# Altium PCB PCB1.PcbDoc
Units mm, origin at the board's own origin, x right, y up, seen from the top; angles counter-clockwise.
Board outline 70.1 x 85.1 mm, 2 copper layers (Top Layer, Bottom Layer), stack 1.58 mm thick; 60 components, 60 nets, 204 pads, 9 vias.
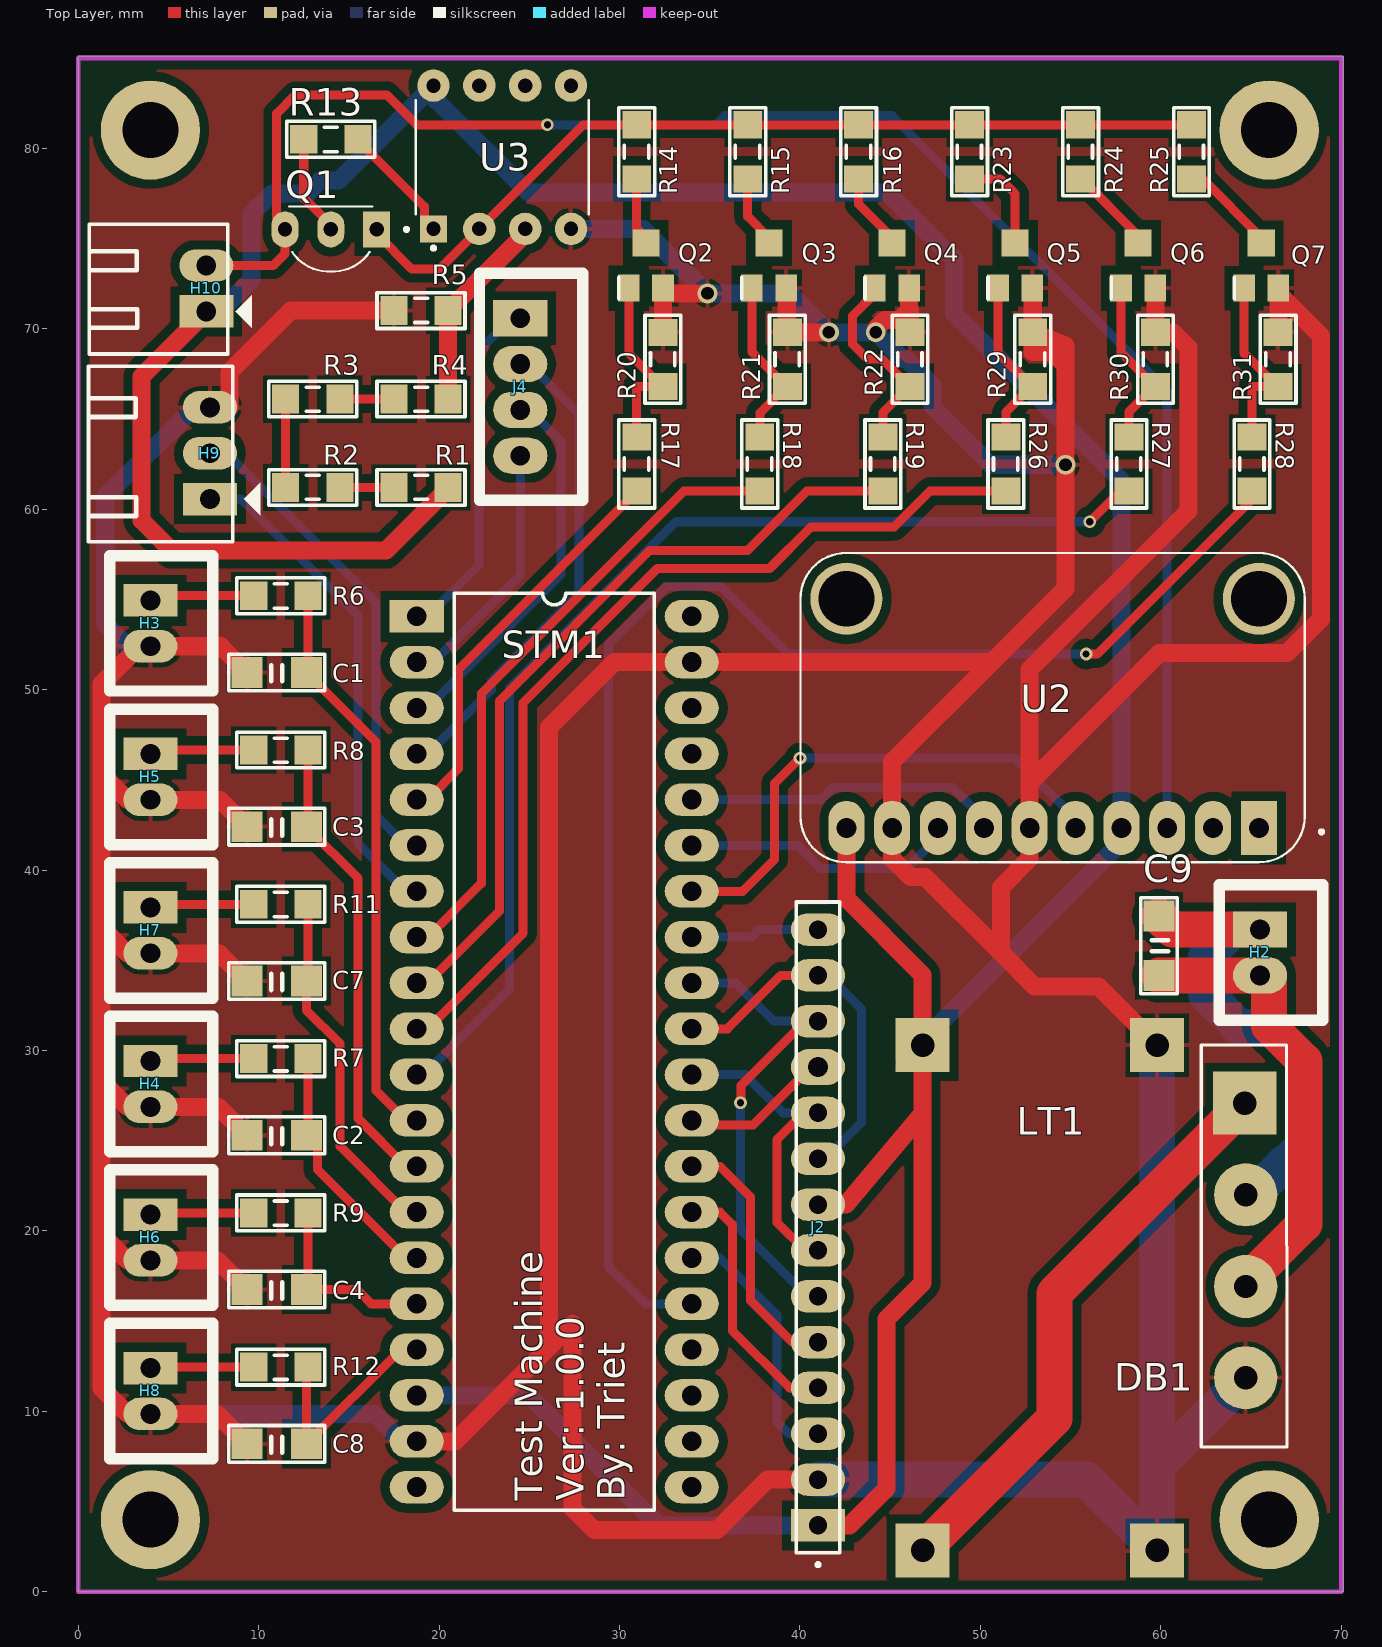
[diagram p0: Top Layer view]
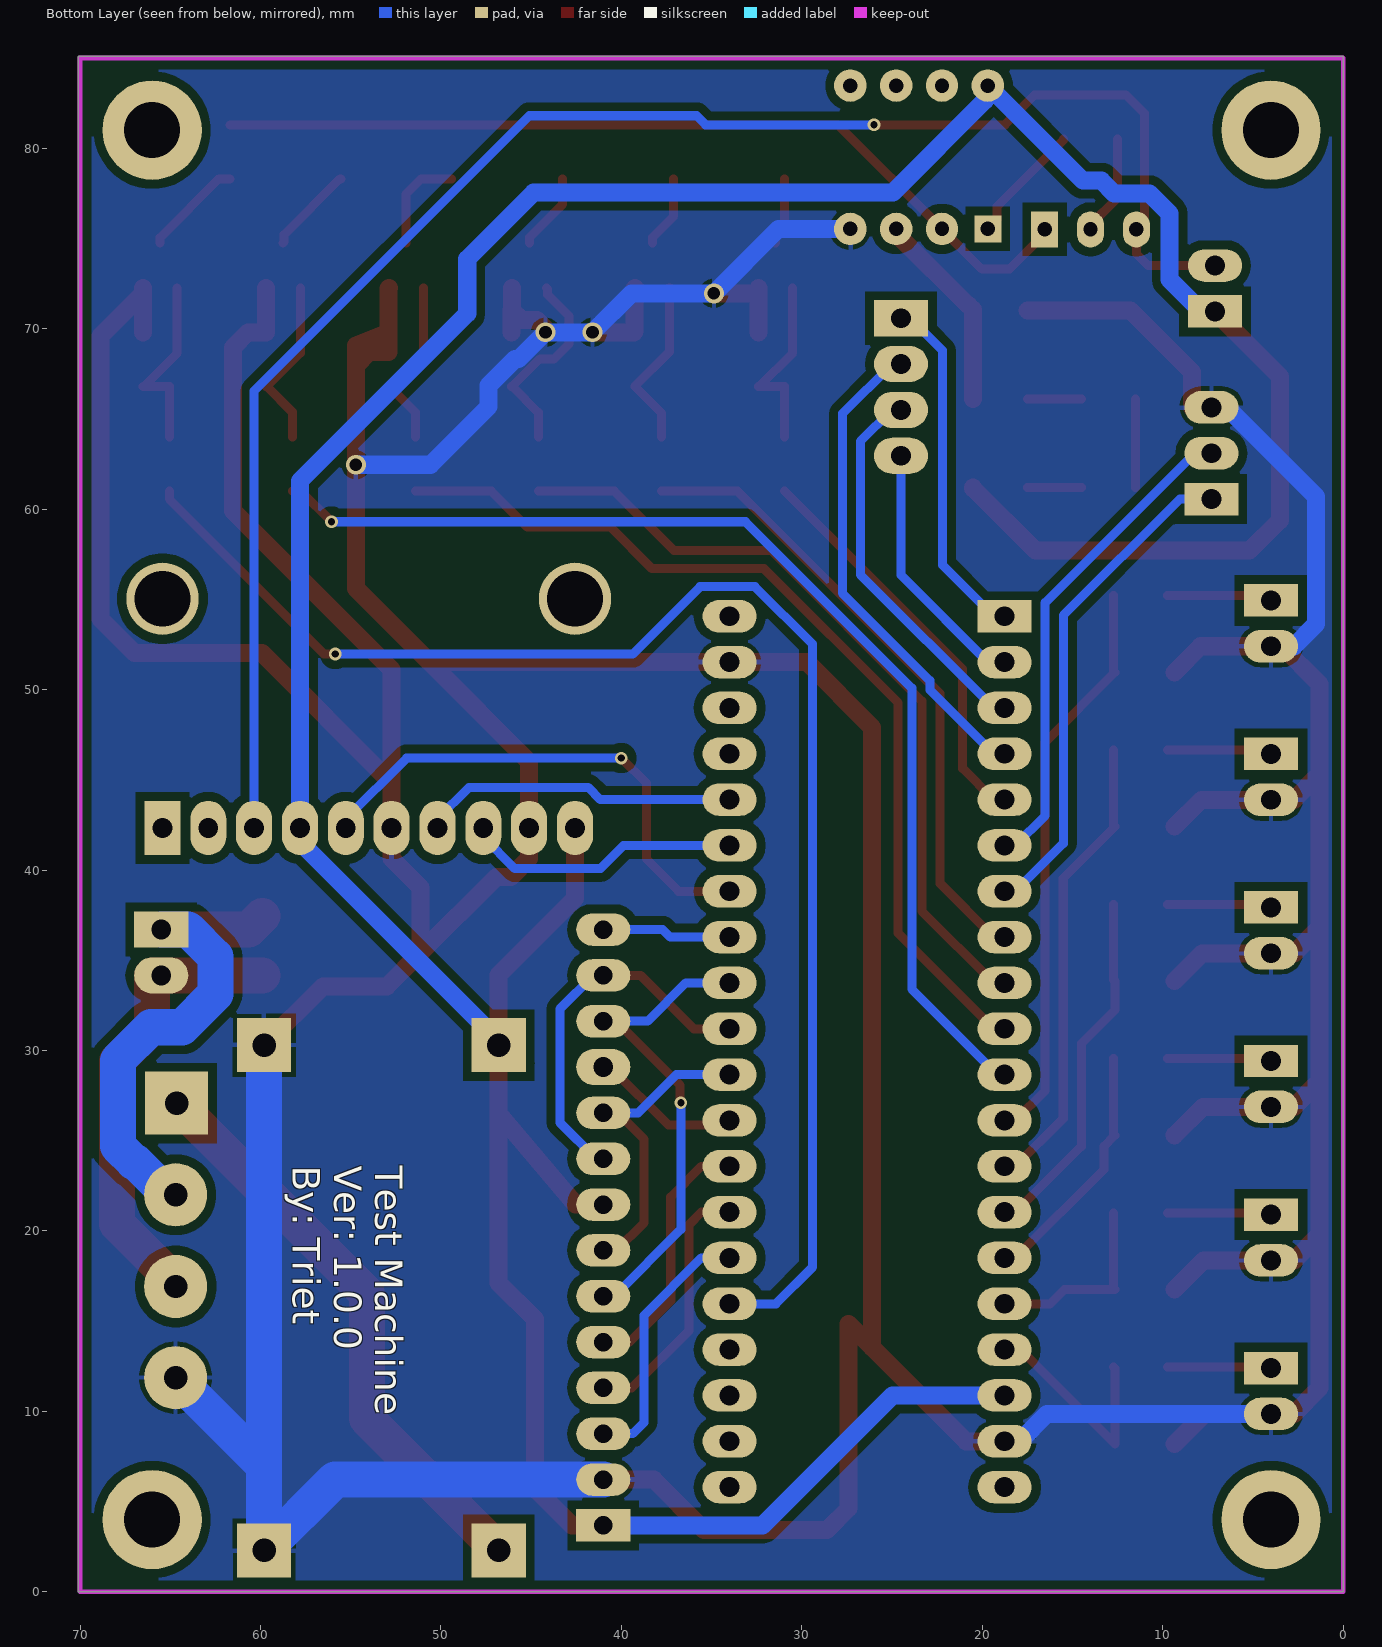
[diagram p1: Bottom Layer view, seen from below]
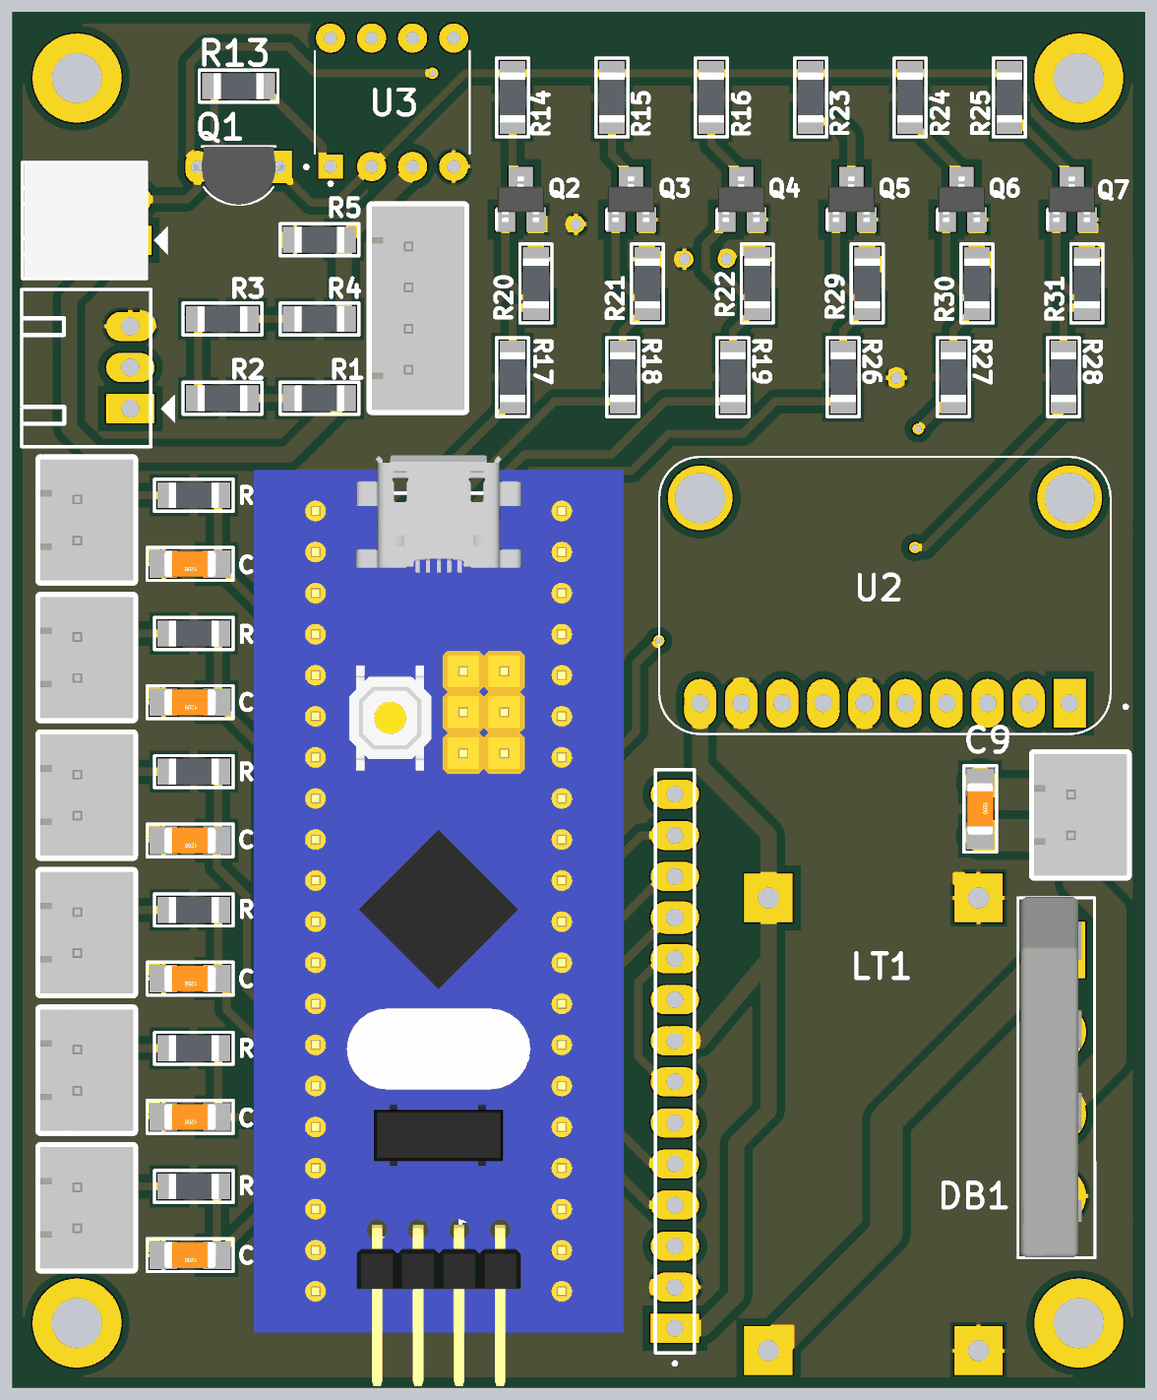
[diagram p2: 3D render of the assembled board from above, using the file's embedded part models]

## Layer stack, top to bottom
Top Solder: solder mask 0.01, Solder Resist, Dk 3.5
Top Layer: signal copper 0.035
Dielectric 1: dielectric 1.51, FR-4, Dk 4.8
Bottom Layer: signal copper 0.035
Bottom Solder: solder mask 0.01, Solder Resist, Dk 3.5

## Board outline
0,0 0,85.1 70.1,85.1 70.1,0

## Design rules (kind name [scope] priority, off if disabled: settings)
Clearance [All] p1: gap=0.5 ignorepadtopadclearanceinfootprint=FALSE
HoleSize [All] p1: absolutevalues=TRUE maxlimit=3.2 minlimit=0.025 maxpercent=80.000 minpercent=20.000
PolygonConnect [All] p1: connectstyle=Relief reliefconductorwidth=0.254 reliefentries=4 polygonreliefangle="90 Angle" airgapwidth=0.254
RoutingVias RoutingVias_power [InNetClass('power_class')] p1: holewidth=0.7 width=1.1 viastyle="Through Hole" minholewidth=0.7 minwidth=1.1 maxholewidth=0.7 maxwidth=1.1
RoutingVias RoutingVias_signal [All] p2: holewidth=0.4 width=0.7 viastyle="Through Hole" minholewidth=0.4 minwidth=0.7 maxholewidth=0.4 maxwidth=0.7
SilkToSilkClearance [All] p1: silktosilkclearance=0
SilkToSolderMaskClearance [IsPad] p1: minsilkscreentomaskgap=0 clearancetoexposedcopper=TRUE
SolderMaskExpansion [All] p1: expansion=0.102 istentingtop=FALSE
Width Width_power [InNetClass('power_class')] p1: maxlimit=2 minlimit=0.7 preferedwidth=1
Width Width_signal [All] p2: maxlimit=0.5 minlimit=0.5 preferedwidth=0.5
27 further rules are at their usual default settings.

## Classes and differential pairs
net class power_class: 0V +5 +12 GND IN+ VCC

## Components (designator, comment, footprint, x,y, rotation, side; value= is the part's Value field where it differs from the comment)
C1 "10nF" "Cap 1206" 11,50.95 r180 top
C2 "10nF" "Cap 1206" 11,25.3 r180 top
C3 "10nF" "Cap 1206" 11,42.4 r180 top
C4 "10nF" "Cap 1206" 11,16.75 r180 top
C7 "10nF" "Cap 1206" 11,33.85 r180 top
C8 "10nF" "Cap 1206" 11,8.2 r180 top
C9 "100uF" "Cap 1206" 59.9,35.8 r270 top
DB1 "6A 1000V" "DIODE CAU 6A CAM" 64.7,27.08 r270 top
H2 "POWER" XH2.54M-2#1 65.5,36.7 r270 top
H3 "BUTTON1" XH2.54M-2#2 4,54.94 r270 top
H4 "BUTTON4" XH2.54M-2#2 4,29.416 r270 top
H5 "BUTTON2" XH2.54M-2#2 4,46.432 r270 top
H6 "BUTTON5" XH2.54M-2#2 4,20.908 r270 top
H7 "BUTTON3" XH2.54M-2#2 4,37.924 r270 top
H8 "BUTTON6" XH2.54M-2#2 4,12.4 r270 top
H9 "COMPORT" "Header 3P DC 2.54" 7.3,60.56 r180 top
H10 "QUEDO" "Header 2P DC 2.54" 7.1,70.96 r180 top
J2 "TFT_TOUCH" SAMTEC_ESQ-114-38-G-S 41,3.68 r90 top
J4 "SDCARD" XH2.54M-4 24.5,70.58 r270 top
LT1 "LT3045" PCBCOMPONENT_1 59.794,2.294 r90 top
Q1 "2N3904" TO92254P460H750-3 14,75.5 r180 top
Q2 "AO3400" SOT95P280X125-3N 31.462,73.5 r90 top
Q3 "AO3400" SOT95P280X125-3N 38.282,73.5 r90 top
Q4 "AO3400" SOT95P280X125-3N 45.102,73.5 r90 top
Q5 "AO3400" SOT95P280X125-3N 51.922,73.5 r90 top
Q6 "AO3400" SOT95P280X125-3N 58.742,73.5 r90 top
Q7 "AO3400" SOT95P280X125-3N 65.562,73.5 r90 top
R1 "1K" "RES 1206" 19,61.2 r0 top
R2 "1K" "RES 1206" 13,61.2 r0 top
R3 "1K" "RES 1206" 13,66.1 r180 top
R4 "1K" "RES 1206" 19,66.1 r180 top
R5 "1K" "RES 1206" 19,71 r0 top
R6 "100R" "RES 1206" 11.229,55.2 r180 top
R7 "100R" "RES 1206" 11.229,29.55 r180 top
R8 "100R" "RES 1206" 11.229,46.65 r180 top
R9 "100R" "RES 1206" 11.229,21 r180 top
R11 "100R" "RES 1206" 11.229,38.1 r180 top
R12 "100R" "RES 1206" 11.229,12.45 r180 top
R13 "1K" "RES 1206" 14,80.5 r180 top
R14 "10R" "RES 1206" 30.952,79.8 r90 top
R15 "100R" "RES 1206" 37.102,79.8 r90 top
R16 "1K" "RES 1206" 43.251,79.8 r90 top
R17 "1K" "RES 1206" 30.952,62.5 r90 top
R18 "1K" "RES 1206" 37.772,62.5 r90 top
R19 "1K" "RES 1206" 44.592,62.5 r90 top
R20 "10K" "RES 1206" 32.4,68.3 r90 top
R21 "10K" "RES 1206" 39.3,68.3 r90 top
R22 "10K" "RES 1206" 46.1,68.3 r90 top
R23 "10K" "RES 1206" 49.401,79.8 r90 top
R24 "100K" "RES 1206" 55.55,79.8 r90 top
R25 "1M" "RES 1206" 61.7,79.8 r90 top
R26 "1K" "RES 1206" 51.412,62.5 r90 top
R27 "1K" "RES 1206" 58.232,62.5 r90 top
R28 "1K" "RES 1206" 65.052,62.5 r90 top
R29 "10K" "RES 1206" 52.9,68.3 r90 top
R30 "10K" "RES 1206" 59.7,68.3 r90 top
R31 "10K" "RES 1206" 66.5,68.3 r90 top
STM1 "KIT STM32F103C8T6" "STM32F103 KIT" 18.76,54.06 r0 top
U2 "ADS1115" MODULE_ZC261500 54,49 r0 top
U3 "OPA2134PA" DIP794W45P254L959H508Q8 23.5,79.5 r90 top

## Footprints (in the part's own frame and the unit in brackets; to place one, negate y for a bottom-side part, rotate by r counter-clockwise, add the part's x,y. Pads: shape width x height; smd on the part's side, far side on the other; paste and mask are expansions set on the pad)
"Cap 1206" [mm]
  rect 1.7x1.7 smd: 1(-1.65,0) 2(1.65,0)
  silkscreen extent -2.67,-1.02 2.67,1.02, body extent -1.6,-0.8 1.6,0.8, height 1.02
"DIODE CAU 6A CAM" [mm] "DIODE CAU 6A CAM"
  rect 3.5x3.5 hole 1.3: 1(0,-0.051)
  round 3.5 hole 1.3: 2(5.08,0) 3(10.16,0) 4(15.215,0)
  silkscreen extent -3.23,-2.46 19.05,2.3, body extent -3.28,-2.29 19.02,1.47, height 23.8
DIP794W45P254L959H508Q8 [mm]
  rect 1.5x1.5 hole 0.8: 1(-3.97,3.81)
  round 1.8 hole 0.8: 2(-3.97,1.27) 3(-3.97,-1.27) 4(-3.97,-3.81) 5(3.97,-3.81) 6(3.97,-1.27) 7(3.97,1.27) 8(3.97,3.81)
  silkscreen extent -5.13,-4.79 3.18,4.8
"Header 2P DC 2.54" [mm]
  rect 3x1.8 hole 1.1: 1(0,0)
  oval 3x1.8 hole 1.1: 2(0,-2.54)
  silkscreen extent -2.53,-4.83 6.48,2.36, body extent -1.27,-4.82 6.35,2.28, height 6.01
"Header 3P DC 2.54" [mm]
  rect 3x1.8 hole 1.1: 1(0,0)
  oval 3x1.8 hole 1.1: 2(0,-2.54) 3(0,-5.08)
  silkscreen extent -2.78,-7.37 6.73,2.36
MODULE_ZC261500 [mm]
  rect 2x3 hole 1.1: 1(11.43,-6.668)
  oval 2x3 hole 1.1: 2(8.89,-6.668) 3(6.35,-6.668) 4(3.81,-6.668) 5(1.27,-6.668) 6(-1.27,-6.668) 7(-3.81,-6.668) 8(-6.35,-6.668) 9(-8.89,-6.668) 10(-11.43,-6.668)
  round 4 hole 3.1: P1(-11.43,6.032) P2(11.43,6.032)
  silkscreen extent -13.97,-8.57 15,8.57
PCBCOMPONENT_1 [mm]
  rect 3x3 hole 1.3: 1(28,13) 2(28,0) 3(0,0) 4(0,13)
"RES 1206" [mm]
  rect 1.5x1.6 smd: 1(-1.5,0) 2(1.5,0)
  silkscreen extent -2.44,-0.99 2.44,0.99, body extent -1.55,-0.8 1.55,0.8, height 0.55
SAMTEC_ESQ-114-38-G-S [mm]
  rect 1.8x3 hole 1.02: 01(0,0)
  oval 1.8x3 hole 1.02: 02(2.54,0) 03(5.08,0) 04(7.62,0) 05(10.16,0) 06(12.7,0) 07(15.24,0) 08(17.78,0) 09(20.32,0) 10(22.86,0) 12(27.94,0) 13(30.48,0) 14(33.02,0)
  oval 2x3 hole 1.1: 11(25.4,0)
  silkscreen extent -2.27,-1.2 34.54,1.21
SOT95P280X125-3N [mm]
  rect 1.5x1.2 smd: 1(-1.25,0.95) 2(-1.25,-0.95)
  rect 1.5x1.5 smd: 3(1.25,0)
  silkscreen extent -1.85,1.5 -0.65,1.5, body extent -1.4,-1.45 1.4,1.45, height 1.25
"STM32F103 KIT" [mm]
  rect 3x1.8 hole 1.1: 1(0,0)
  oval 3x1.8 hole 1.1: 2(0,-2.54) 3(0,-5.08) 4(0,-7.62) 5(0,-10.16) 6(0,-12.7) 7(0,-15.24) 8(0,-17.78) 9(0,-20.32) 10(0,-22.86) 11(0,-25.4) 12(0,-27.94) 13(0,-30.48) 14(0,-33.02) 15(0,-35.56) 16(0,-38.1) 17(0,-40.64) 18(0,-43.18) 19(0,-45.72) 20(0,-48.26) 21(15.24,-48.26) 22(15.24,-45.72) 23(15.24,-43.18) 24(15.24,-40.64) 25(15.24,-38.1) 26(15.24,-35.56) 27(15.24,-33.02) 28(15.24,-30.48) 29(15.24,-27.94) 30(15.24,-25.4) 31(15.24,-22.86) 32(15.24,-20.32) 33(15.24,-17.78) 34(15.24,-15.24) 35(15.24,-12.7) 36(15.24,-10.16) 37(15.24,-7.62) 38(15.24,-5.08) 39(15.24,-2.54) 40(15.24,0)
  silkscreen extent 2.09,-49.53 13.16,1.27, body extent -3.81,-53.97 19.05,3.59, height 16.12
TO92254P460H750-3 [mm]
  rect 1.5x2 hole 0.8: 1(-2.54,0)
  oval 1.5x2 hole 0.8: 2(0,0) 3(2.54,0)
  silkscreen extent -4.29,-1.27 2.3,2.33, body extent -2.74,-1.27 2.74,2.33, height 8.09
XH2.54M-2#1 [mm]
  rect 2x3 hole 1.1: 1(0,0)
  oval 2x3 hole 1.1: 2(2.54,0)
  silkscreen extent -2.48,-2.26 5.02,3.46, body extent -2.48,-2.26 5.02,3.48, height 6.91
XH2.54M-2#2 [mm]
  rect 1.8x3 hole 1.1: 1(0,0)
  oval 1.8x3 hole 1.1: 2(2.54,0)
  silkscreen extent -2.48,-2.26 5.02,3.46, body extent -2.48,-2.26 5.02,3.48, height 6.91
XH2.54M-4 [mm]
  rect 2x3 hole 1.1: 1(0,0)
  oval 2x3 hole 1.1: 2(2.54,0) 3(5.08,0) 4(7.62,0)
  silkscreen extent -2.48,-2.26 10.1,3.46, body extent -2.48,-2.26 10.1,3.48, height 6.91

## Part data
C1 C2 C3 C4 C7 C8 C9: library part "Cap 1206", "Capacitor SMD 1206"
DB1: library part "Diode CAU 6A", "Cắm", Chung_Loai=cắm, Don_Vi=Con, Ma_Hang=MH004297, Ten_Linh_Kien="Diode Cầu 6A 1000V KBL610"
H2 H3 H4 H5 H6 H7 H8 H10: library part "Header 2P 2.54 Duc Thang", "Cắm", Chung_Loai=Cắm, Don_Vi=Con, Ma_Hang=MH001283, Ten_Linh_Kien="Header 2P XH2.54-2P Đực Thẳng"
H9: library part "Header 3P 2.54 Duc Thang", "Cắm", Chung_Loai=Cắm, Don_Vi=Con, Ma_Hang=MH001292, Ten_Linh_Kien="Header 3P XH2.54-3P Đực Thẳng"
J2: library part ESQ-114-38-G-S, Package=None, Availability=Unavailable, MP=ESQ-114-38-G-S, Price=None
J4: library part CON-PLG_4X1-78-ST-TH, "Connector Header Through Hole 4 position 0.079\" (2.00mm)", Alternate Part Number-1=NA, Case/Package=TH, Crimp Part Number=ASPHSPH24K51, Manufacturer=JST, Manufacturer Part Number=B4B-PH-K-S(LF)(SN), Mating Part Number=PHR-4, Supplier Part Number-1=NA, Supplier-1="SP Road"
Q1: "BJT, TO-92, 40V, 200mA, NPN, 0.625W, 150Â°C", Package="TO-92 Diotec", Check_prices=https://www.snapeda.com/parts/2N3904/Diotec/view-part/?ref=eda, MF="Diotec Semiconductor", MP=2N3904, SnapEDA_Link=https://www.snapeda.com/parts/2N3904/Diotec/view-part/?ref=snap
Q2 Q3 Q4 Q5 Q6 Q7: "N-Channel 30 V 5.8A (Ta) 1.4W (Ta) Surface Mount SOT-23-3", Package="SOT-23-3 Alpha &amp; Omega Semiconductor", Check_prices=https://www.snapeda.com/parts/AO3400/Alpha+%2526+Omega+Semiconductor+Inc./view-part/?ref=eda, MF="Alpha &", MP=AO3400, SnapEDA_Link=https://www.snapeda.com/parts/AO3400/Alpha+%2526+Omega+Semiconductor+Inc./view-part/?ref=snap
R1 R2 R3 R4 R5 R6 R7 R8 R9 R11 R12 R13 R14 R15 R16 R17 R18 R19 R20 R21 R22 R23 R24 R25 R26 R27 R28 R29 R30 R31: library part "RES 1206", "RES SMD 1206", Manufacturer="Vishay Dale", Manufacturer Part Number=CRCW040210K0FKED, Operating Temperature="-55°C ~ 155°C", Package / Case="0402 (1005 Metric)", Power (Watts)="0.063W, 1/16W", Resistance (Ohms)=10k, Supplier Part Number 1=541-10.0KLCT-ND, Temperature Coefficient=±100ppm/°C, Tolerance=±1%, Category=Resistors, ComponentLink1Description=http://www.vishay.com/docs/20035/dcrcwe3.pdf, ComponentLink1URL=http://www.vishay.com/docs/20035/dcrcwe3.pdf, Composition="Thick Film", Features="Automotive AEC-Q200", Height="0.016\" (0.40mm)", Number of Terminations=2, Packaging="Cut Tape (CT)", Pricing 1="10=0.083, 50=0.0444, 200=0.0255, 1000=0.0174 (USD)", RoHS="RoHS Compliant", Size / Dimension="0.039\" L x 0.020\" W (1.00mm x 0.50mm)", Stock 1=2392462, Supplier 1=Digi-Key, Supplier Device Package="0402 (1005 Metric)"
STM1: library part "STM32f103 Bluepill", "KIT STM32F103C8T6 Bluepill"
U2: library part ZC261500, "ADS1115 Module ADC 4 channel with Pro Gain Amplifier for Arduino RPi", Package=None, Availability=Unavailable, MF=YKS, MP=ZC261500, Price=None, SnapEDA_Link=https://www.snapeda.com/parts/ZC261500/YKS/view-part/621058/?ref=snap
U3: "SoundPlus&trade; Audio Operational Amplifier with Low Distortion, Low Noise and Precision 8-PDIP -40 to 85", Package="PDIP-8 Texas Instruments", Availability=Unavailable, BuyPart=https://www.snapeda.com/parts/OPA2134PA/Texas%20Instruments/view-part/621607/?ref=eda, MF="Texas Instruments", MP=OPA2134PA, Price=None, SnapEDA_Link=https://www.snapeda.com/parts/OPA2134PA/Texas%20Instruments/view-part/621607/?ref=snap, Texas_Instruments-Purchase-URL=https://snapeda.com/shop?store=Texas+Instruments&id=621607

## Free pads (board coordinates)
  round 5.5 hole 3.1 unplated: 1(4,81) 2(4,4) 3(66,81) 4(66,4)

## Via types
v1: diameter 0.7, hole 0.4, Top Layer to Bottom Layer, 5 vias
v2: diameter 1.1, hole 0.7, Top Layer to Bottom Layer, 4 vias

## Nets (pads, with @x,y where several pads share a name; then routed paths per layer and width w, separated by ;. In a path a pad name is that pad's centre, name@x,y a point inside that pad or via, vN(x,y) a via of type N, cw(c..) or ccw(c..) an arc to the next point about the centre after c; other vN are vias at no path point)
0V: C9.2 DB1.3 H2.2 | length 25.5
  Top Layer w2: C9.2 59.91,34.16 H2.2 66,34.16 66,31.351 67.95,29.4 67.95,20.388 64.7,17.138 DB1.3
+5: H10.1 J2.01 J2.08 LT1.1 R1.2 STM1.18 U2.4 U2.10 U3.8 | length 215.6
  Top Layer w1: H10.1 3.5,67.36 3.5,59.381 5.181,57.7 17.05,57.7 20.5,61.15 R1.2 ; J2.01 42.745,3.68 44.794,5.728 44.794,15.118 46.8,17.124 46.8,26.513 ; J2.08 42.545,21.46 46.8,26.513 ; U2.10 42.57,38.417 46.8,34.187 46.8,29.2 46.8,26.513
  Bottom Layer w1: H10.1 7.847,70.96 9.611,72.724 9.611,76.376 10.735,77.5 12.7,77.5 13.4,78.2 14.42,78.2 19.36,83.14 U3.8 19.843,83.317 19.843,83.14 19.843,82.657 24.954,77.546 44.856,77.546 48.54,73.862 48.54,70.84 57.81,61.57 57.81,41.562 57.619,41.371 57.619,41.353 47.694,31.428 LT1.1@47.694,30.094 ; STM1.18 24.968,10.88 32.168,3.68 J2.01 ; LT1.1@45.794,29.294 LT1.1@46.687,30.187
+12: C9.1 DB1.2 H2.1 | length 27.6
  Top Layer w2: C9.1 60.65,36.7 H2.1
  Bottom Layer w2: DB1.2 65.106,22 66.936,23.83 67.021,23.83 67.899,24.709 67.899,29.451 66.063,31.288 64.337,31.288 62.5,33.124 62.5,35.196 64.004,36.7 H2.1
ADC_SCL: STM1.35 U2.8 | length 15.4
  Bottom Layer w0.5: STM1.35 39.879,41.36 41.156,40.082 45.9,40.082 47.65,41.832 U2.8
ADC_SDA: STM1.36 U2.7 | length 17.7
  Bottom Layer w0.5: STM1.36 41.163,43.9 41.845,44.582 48.44,44.582 50.19,42.832 U2.7
ALERT: STM1.34 U2.5 | length 28.7
  Top Layer w0.5: STM1.34 36.82,38.82 38.6,40.6 38.6,44.8 v1(40,46.2)
  Bottom Layer w0.5: v1(40,46.2) 51.902,46.2 55.27,42.832 U2.5
BUTTON1: C1.1 R6.1 STM1.12 | length 32
  Top Layer w0.5: R6.1 12.729,51.029 C1.1 16.51,47.09 16.51,27.77 18.16,26.12 STM1.12
BUTTON2: C3.1 R8.1 STM1.13 | length 26
  Top Layer w0.5: R8.1 12.729,42.479 C3.1 15.51,39.54 15.51,26.23 18.16,23.58 STM1.13
BUTTON3: C7.1 R11.1 STM1.14 | length 20
  Top Layer w0.5: R11.1 12.729,33.929 C7.1 12.65,32.239 14.51,30.379 14.51,24.69 18.16,21.04 STM1.14
BUTTON4: C2.1 R7.1 STM1.15 | length 14
  Top Layer w0.5: R7.1 12.729,25.379 C2.1 13.25,24.7 13.25,23.41 18.16,18.5 STM1.15
BUTTON5: C4.1 R9.1 STM1.16 | length 10.7
  Top Layer w0.5: R9.1 12.729,16.829 C4.1 15.45,16.75 16.24,15.96 STM1.16
BUTTON6: C8.1 R12.1 STM1.17 | length 12.6
  Top Layer w0.5: R12.1 12.65,12.371 C8.1 17.87,13.42 STM1.17
CS: J2.03 STM1.26 | length 14.5
  Bottom Layer w0.5: STM1.26 35.56,18.5 38.735,15.325 38.735,9.395 39.37,8.76 J2.03
D/C: J2.05 STM1.28 | length 14.4
  Top Layer w0.5: STM1.28 35.56,23.58 37.262,21.878 37.262,16.138 39.56,13.84 J2.05
GND: C1.2 C2.2 C3.2 C4.2 C7.2 C8.2 DB1.4 H3.2 H4.2 H5.2 H6.2 H7.2 H8.2 H9.3 J2.02 LT1.2 LT1.3 Q2.2 Q3.2 Q4.2 Q5.2 Q6.2 Q7.2 R5.1 R20.2 R21.2 R22.2 R29.2 R30.2 R31.2 STM1.19 STM1.39 U2.6 U2.9 U3.4 | length 487.7
  Top Layer w1: H9.3 8.382,65.64 8.382,67.589 11.793,71 R5.1 ; C8.2 7.69,9.86 H8.2 2.726,9.86 1.3,11.286 1.3,19.794 ; C4.2 7.732,18.368 H6.2 2.726,18.368 1.3,19.794 ; C2.2 7.774,26.876 H4.2 2.726,26.876 1.3,28.302 ; C7.2 7.816,35.384 H7.2 2.726,35.384 1.3,36.81 ; C3.2 7.858,43.892 H5.2 2.726,43.892 1.3,45.318 ; C1.2 7.9,52.4 H3.2 3.4,52.4 1.3,50.3 1.3,45.318 ; STM1.19 20.888,8.34 26.1,13.552 ; R20.2 32.4,70.866 32.412,70.878 Q2.2@32.412,71.958 ; Q2.2 Q2.2@32.412,71.958 ; v2(34.874,71.958) Q2.2@32.412,71.958 ; Q3.2 39.266,72.216 39.266,69.834 R21.2 v2(41.6,69.8) ; J2.02 38.202,6.22 35.411,3.429 28.6,3.429 27.4,4.629 27.4,14.852 26.1,13.552 ; v2(44.2,69.8) 44.219,69.819 44.219,70.018 44.683,70.482 45.514,70.482 46.1,71.068 R22.2 ; 46.052,71.068 Q4.2 ; Q5.2 52.9,72.222 R29.2 ; Q6.2 59.692,69.808 R30.2 60.681,69.8 61.519,68.962 61.519,59.893 52.73,51.104 52.73,44.831 ; LT1.2@60.35,30.85 LT1.2 56.537,33.55 53,33.55 51.13,35.42 ; R31.2 66.512,69.812 Q7.2@66.512,71.958 ; Q7.2 Q7.2@66.512,71.958 ; 1.3,19.794 1.3,28.302 ; 1.3,28.302 1.3,36.81 ; 1.3,36.81 1.3,45.318 ; 26.1,13.552 26.1,47.9 29.72,51.52 STM1.39 50.631,51.52 ; 50.631,51.52 45.11,45.999 U2.9 45.11,40.64 46.126,39.624 46.926,39.624 51.13,35.42 ; 50.631,51.52 54.712,55.601 v2(54.712,62.459) 54.712,67.97 ; 51.13,35.42 51.13,39.04 52.73,40.64 U2.6 52.73,44.831 ; 52.73,44.831 59.918,52.019 66.98,52.019 68.873,53.912 68.873,69.597 Q7.2@66.512,71.958 ; R29.2 52.9,68.707 53.975,68.707 54.712,67.97 ; R29.2 54.712,69.063 54.712,67.97
  Bottom Layer w1: H8.2 16.424,9.86 17.944,8.34 STM1.19 ; H3.2 2.726,52.4 1.5,53.626 1.5,60.7 6.44,65.64 H9.3 ; U3.4 31.302,75.53 v2(34.874,71.958) 39.442,71.958 v2(41.6,69.8) v2(44.2,69.8) 45.687,68.313 45.887,68.313 47.355,66.845 47.355,65.675 50.571,62.459 v2(54.712,62.459) ; LT1.2 LT1.2@60.794,31.294
  Bottom Layer w2: J2.02 55.867,6.22 LT1.3 59.794,6.959 ; LT1.2 59.794,6.959 ; DB1.4 59.794,6.959
IN+: R4.1 R5.2 U3.3 | length 11.2
  Top Layer w1: R4.1 20.5,68.529 20.5,71.05 20.75,71.3 20.8,71.3 24.617,75.117 24.617,75.377 U3.3
IN-: Q1.1 R14.2 R15.2 R16.2 R23.2 R24.2 R25.2 U3.2 | length 49.5
  Top Layer w0.5: Q1.1 16.54,75.25 18.49,73.3 20.021,73.3 22.23,75.509 U3.2 28,81.3 R14.2 R15.2 R16.2 R23.2 R24.2 R25.2
INA: Q1.2 R13.2 | length 5.6
  Top Layer w0.5: R13.2 12.5,77.25 14,75.75 Q1.2
INPUT: H10.2 Q1.3 U2.3 | length 93.8
  Top Layer w0.5: H10.2 10.795,73.5 11.46,74.165 Q1.3 11.46,75.743 10.998,76.205 10.998,81.915 12.04,82.956 17.094,82.956 18.751,81.3 v1(26,81.3)
  Bottom Layer w0.5: v1(26,81.3) 35.326,81.3 35.826,81.8 45.098,81.8 60.35,66.548 U2.3
NetH3_1: H3.1 R6.2 | length 5.8
  Top Layer w0.5: H3.1 4.26,55.2 R6.2
NetH4_1: H4.1 R7.2 | length 5.8
  Top Layer w0.5: H4.1 4.134,29.55 R7.2
NetH5_1: H5.1 R8.2 | length 5.8
  Top Layer w0.5: H5.1 4.218,46.65 R8.2
NetH6_1: H6.1 R9.2 | length 5.8
  Top Layer w0.5: H6.1 4.092,21 R9.2
NetH7_1: H7.1 R11.2 | length 5.8
  Top Layer w0.5: H7.1 4.176,38.1 R11.2
NetH8_1: H8.1 R12.2 | length 5.7
  Top Layer w0.5: H8.1 4.05,12.45 R12.2
NetQ2_1: Q2.1 R17.2 R20.1 | length 10.5
  Top Layer w0.5: Q2.1 30.512,68.638 R20.1@32.35,66.8 ; R17.2 30.952,66.8 R20.1@32.35,66.8 ; R20.1 R20.1@32.35,66.8
NetQ2_3: Q2.3 R14.1 | length 3.8
  Top Layer w0.5: R14.1 30.952,75.559 31.462,75.05 Q2.3
NetQ3_1: Q3.1 R18.2 R21.1 | length 9.7
  Top Layer w0.5: Q3.1 37.332,68.718 39.25,66.8 37.772,65.322 R18.2
NetQ3_3: Q3.3 R15.1 | length 4
  Top Layer w0.5: R15.1 37.102,76.23 38.282,75.05 Q3.3
NetQ4_1: Q4.1 R19.2 R22.1 | length 11.2
  Top Layer w0.5: Q4.1 44.102,72.2 44.102,71.9 42.9,70.698 42.9,69.162 43.731,68.331 44.519,68.331 R22.1@46.05,66.8 ; R19.2 44.592,65.342 R22.1@46.05,66.8 ; R22.1 R22.1@46.05,66.8
NetQ4_3: Q4.3 R16.1 | length 4.3
  Top Layer w0.5: R16.1 43.251,76.9 45.102,75.05 Q4.3
NetQ5_1: Q5.1 R26.2 R29.1 | length 9.6
  Top Layer w0.5: Q5.1 50.972,68.678 52.85,66.8 51.412,65.362 R26.2
NetQ5_3: Q5.3 R23.1 | length 5.6
  Top Layer w0.5: R23.1 51.092,78.3 51.922,77.47 Q5.3
NetQ6_1: Q6.1 R27.2 R30.1 | length 9.7
  Top Layer w0.5: Q6.1 57.792,68.658 R30.1@59.65,66.8 ; R27.2 58.232,65.382 R30.1@59.65,66.8 ; R30.1 R30.1@59.65,66.8
NetQ6_3: Q6.3 R24.1 | length 4.9
  Top Layer w0.5: R24.1 55.6,78.3 58.692,75.209 58.692,74.8 Q6.3
NetQ7_1: Q7.1 R28.2 R31.1 | length 10.5
  Top Layer w0.5: Q7.1 64.612,68.638 R31.1@66.45,66.8 ; R28.2 65.052,66.8 R31.1@66.45,66.8 ; R31.1 R31.1@66.45,66.8
NetQ7_3: Q7.3 R25.1 | length 5.5
  Top Layer w0.5: R25.1 62.312,78.3 65.562,75.05 Q7.3
NetR1_1: R1.1 R2.2 | length 3
  Top Layer w0.5: R2.2 R1.1
NetR2_1: R2.1 R3.2 | length 4.9
  Top Layer w0.5: R2.1 11.5,63.627 R3.2
NetR3_1: R3.1 R4.2 | length 3
  Top Layer w0.5: R3.1 R4.2
OUT_A: R13.1 U3.1 | length 6.7
  Top Layer w0.5: R13.1 15.5,80.45 19.19,76.76 19.19,76.03 U3.1
R_1: R17.1 STM1.5 | length 22.5
  Top Layer w0.5: STM1.5 19.36,43.9 21.087,45.627 21.087,51.135 R17.1
R_2: R18.1 STM1.8 | length 35.4
  Top Layer w0.5: STM1.8 19.36,36.28 22.341,39.261 22.341,49.778 33.563,61 R18.1
R_3: R19.1 STM1.9 | length 43.9
  Top Layer w0.5: STM1.9 19.36,33.74 23.341,37.721 23.341,49.364 31.687,57.71 37.093,57.71 40.383,61 R19.1
R_4: R26.1 STM1.10 | length 52.5
  Top Layer w0.5: STM1.10 19.36,31.2 24.657,36.497 24.657,49.266 32.101,56.71 38.31,56.71 40.6,59 45.203,59 47.203,61 R26.1
R_5: R27.1 STM1.11 | length 62.6
  Top Layer w0.5: v1(56.062,59.3) 57.762,61 R27.1
  Bottom Layer w0.5: STM1.11 19.16,28.66 23.9,33.4 23.9,50.08 33.12,59.3 v1(56.062,59.3)
R_6: R28.1 STM1.25 | length 82.5
  Top Layer w0.5: v1(55.855,51.968) 56.467,51.968 65.052,60.554 R28.1
  Bottom Layer w0.5: STM1.25 31.44,15.96 29.4,18 29.4,52.514 32.596,55.71 35.628,55.71 39.37,51.968 v1(55.855,51.968)
RESET: J2.04 STM1.27 | length 14.5
  Top Layer w0.5: STM1.27 35.56,21.04 36.25,20.35 36.25,14.478 39.428,11.3 J2.04
SCK: J2.07 J2.10 STM1.30 | length 18.3
  Top Layer w0.5: J2.07 40.28,18.92 38.735,20.465 38.735,25.07 40.205,26.54 J2.10
  Bottom Layer w0.5: STM1.30 36.945,28.66 39.065,26.54 J2.10
SD_CS: J4.1 STM1.1 | length 19.5
  Bottom Layer w0.5: STM1.1 19.36,54.06 22.2,56.9 22.2,68.78 24,70.58 J4.1
SD_MISO: J4.3 STM1.3 | length 21.4
  Bottom Layer w0.5: STM1.3 19.36,48.98 26.75,56.37 26.75,63.75 25,65.5 J4.3
SD_MOSI: J4.2 STM1.4 | length 27.3
  Bottom Layer w0.5: STM1.4 19.36,46.44 22.9,49.98 22.9,50.494 27.75,55.344 27.75,65.29 25,68.04 J4.2
SD_SCK: J4.4 STM1.2 | length 14.4
  Bottom Layer w0.5: STM1.2 19.681,51.52 24.5,56.339 J4.4
SDI: J2.06 J2.12 STM1.32 | length 27.4
  Top Layer w0.5: v1(36.7,27.1) 36.738,27.138 36.738,28.069 40.29,31.62 J2.12
  Bottom Layer w0.5: STM1.32 36.424,33.74 38.544,31.62 J2.12 ; v1(36.7,27.1) 36.7,20.08 40.4,16.38 J2.06
SDO: J2.09 J2.13 STM1.31 | length 20.9
  Top Layer w0.5: STM1.31 35.978,31.2 38.938,34.16 J2.13
  Bottom Layer w0.5: J2.09 41.393,24 43.4,26.007 43.4,32.3 41.54,34.16 J2.13
T_CS: J2.11 STM1.29 | length 8.4
  Top Layer w0.5: STM1.29 34.247,25.873 37.4,25.873 40.607,29.08 J2.11
T_IRQ: J2.14 STM1.33 | length 7.2
  Bottom Layer w0.5: STM1.33 37.287,36.28 37.707,36.7 J2.14
UART1_RX: H9.1 STM1.7 | length 27.9
  Bottom Layer w0.5: H9.1 9.047,60.56 15.5,54.107 15.5,41.48 18.16,38.82 STM1.7
UART1_TX: H9.2 STM1.6 | length 27.4
  Bottom Layer w0.5: H9.2 8.221,63.1 16.51,54.811 16.51,43.01 18.16,41.36 STM1.6
VCC: DB1.1 LT1.4 | length 32.2
  Top Layer w2: LT1.4 54.1,9.6 54.1,16.531 DB1.1
pads on no net: STM1.20 STM1.21 STM1.22 STM1.23 STM1.24 STM1.37 STM1.38 STM1.40 U2.1 U2.2 U2.P1 U2.P2 U3.5 U3.6 U3.7

## Polygon pours and split planes (outlines as drawn)
GND on Bottom Layer "GND_L02_P000" (solid, remove dead copper, pour order 0): 0,0 70,0 70,85 0,85
GND on Top Layer "GND_L01_P001" (solid, remove dead copper, pour order 1): 0,0 70,0 70,85 0,85

## Keep-outs
Keep-Out Layer:
  lines w0.254: 0,0 70,0 70,85 0,85 0,0

## Silkscreen, mask and mechanical layers (free items; w line width, h text height)
Top Overlay:
  text "Test Machine / Ver: 1.0.0 / By: Triet" at 30.3,5.044 h1.52 r90
Bottom Overlay:
  text "Test Machine / Ver: 1.0.0 / By: Triet" at 58.2,23.6 h1.52 r90